# EAGLE board Stunning Densor (1) (EAGLE 9.7.0)

Size 44.69 x 65.12 mm. Coordinates in mm from the lower left corner, seen from the top.
Outline: 0,0 44.69,0 44.69,65.12 0,65.12 0,0
Copper layers (1*16): Top 0.035mm / dielectric 1.5mm / Bottom 0.035mm
Design rules "default": minimum track width 6mil, minimum drill 0.35mm, track to track 6mil, track to pad 6mil, pad to pad 6mil, via to via 6mil, smd to smd 6mil, copper to edge 40mil, drill to drill 6mil, minimum pad ring 10mil, minimum via ring 8mil, stop-mask expansion 4mil, vias tented up to drill 0mil, thermal gap 10mil

## Footprints (pad centres in the part's own frame; a part is rotated, then mirrored left to right if it is on the bottom)
BATTERY-GENERIC = drill 1.118 pad 3.15 octagon: + 2.54,0; - -2.54,0
LED-RGB-5MM = drill 0.9: B 0.635,0.635; C -0.635,-0.635; G 1.905,-0.635; R -1.905,0.635
LEDRD254W60D565H860B = drill 0.981 pad 1.581: 1 -1.27,0; 2 1.27,0
LEDRD254W60D565H860B_B = drill 0.981 pad 1.581: 1 -1.27,0; 2 1.27,0
LEDRD254W60D565H860B_G = drill 0.981 pad 1.581: 1 -1.27,0; 2 1.27,0
RESAD1016W63L850D250B = drill 0.83 pad 1.43: 1 -5.08,0; 2 5.08,0
SWITCH-MOMENTARY-PTH-6.5MM = drill 1.016 pad 1.88: 1 -3.251,2.261; 2 3.251,2.261; 3 -3.251,-2.261; 4 3.251,-2.261

## Placement (x,y rotation side)
BAT1  9V  [BATTERY-GENERIC]  20.68,8.26 180 top
D1  LED-RGBRCBG-PTH  [LED-RGB-5MM]  22.52,57.63 0 top
D2  RED  [LEDRD254W60D565H860B]  9.53,35.33 180 top
D3  BLUE  [LEDRD254W60D565H860B_B]  23.17,35.07 180 top
D4  GREEN  [LEDRD254W60D565H860B_G]  37.09,35.2 180 top
R1  480  [RESAD1016W63L850D250B]  10.79,30.25 90 top
R2  480  [RESAD1016W63L850D250B]  24.44,29.99 90 top
R3  480  [RESAD1016W63L850D250B]  38.36,30.12 90 top
R4  480  [RESAD1016W63L850D250B]  21.25,52.55 90 top
S1  SWITCH_MOMENTARY  [SWITCH-MOMENTARY-PTH-6.5MM]  8.26,21.36 90 top
S2  SWITCH_MOMENTARY  [SWITCH-MOMENTARY-PTH-6.5MM]  21.9,21.1 90 top
S3  SWITCH_MOMENTARY  [SWITCH-MOMENTARY-PTH-6.5MM]  35.82,21.23 90 top

## Library data of the parts
BAT1 D1 R1-R4 S1-S3 = Tinkercad
D2 = Tinkercad; CATEGORY: Opto-Electronic; SUB-CATEGORY: LED; VALUE: LED_RED
D3 = Tinkercad; CATEGORY: Opto-Electronic; SUB-CATEGORY: LED; VALUE: LED_BLUE
D4 = Tinkercad; CATEGORY: Opto-Electronic; SUB-CATEGORY: LED; VALUE: LED_GREEN

## Nets
BAT1+: BAT1.+ S1.1 S2.1 S3.1
BAT1-: BAT1.- D2.2 D3.2 D4.2 R4.1
D1_C: D1.C R4.2
D2_A: D2.1 R1.2
D3_A: D3.1 R2.2
D4_A: D4.1 R3.2
S1_3: D1.R R1.1 S1.3 S1.4
S2_3: D1.B R2.1 S2.3 S2.4
S3_3: D1.G R3.1 S3.3 S3.4

## Tracks (layer width: path | path; a pad name or v marks a point on that pad's centre or on a via)
BAT1+  (3 unrouted)
BAT1-  (4 unrouted)
D1_C  (1 unrouted)
D2_A  (1 unrouted)
D3_A  (1 unrouted)
D4_A  (1 unrouted)
S1_3  (3 unrouted)
S2_3  (3 unrouted)
S3_3  (3 unrouted)